# Altium PCB 5V_SPI_Oled_Rev1.1.PcbDoc
Units mil, origin at the board's own origin, x right, y up, seen from the top; angles counter-clockwise.
Board outline 1000 x 871 mil, 2 copper layers (Top Layer, Bottom Layer); 13 components, 20 nets, 76 pads, 9 vias.
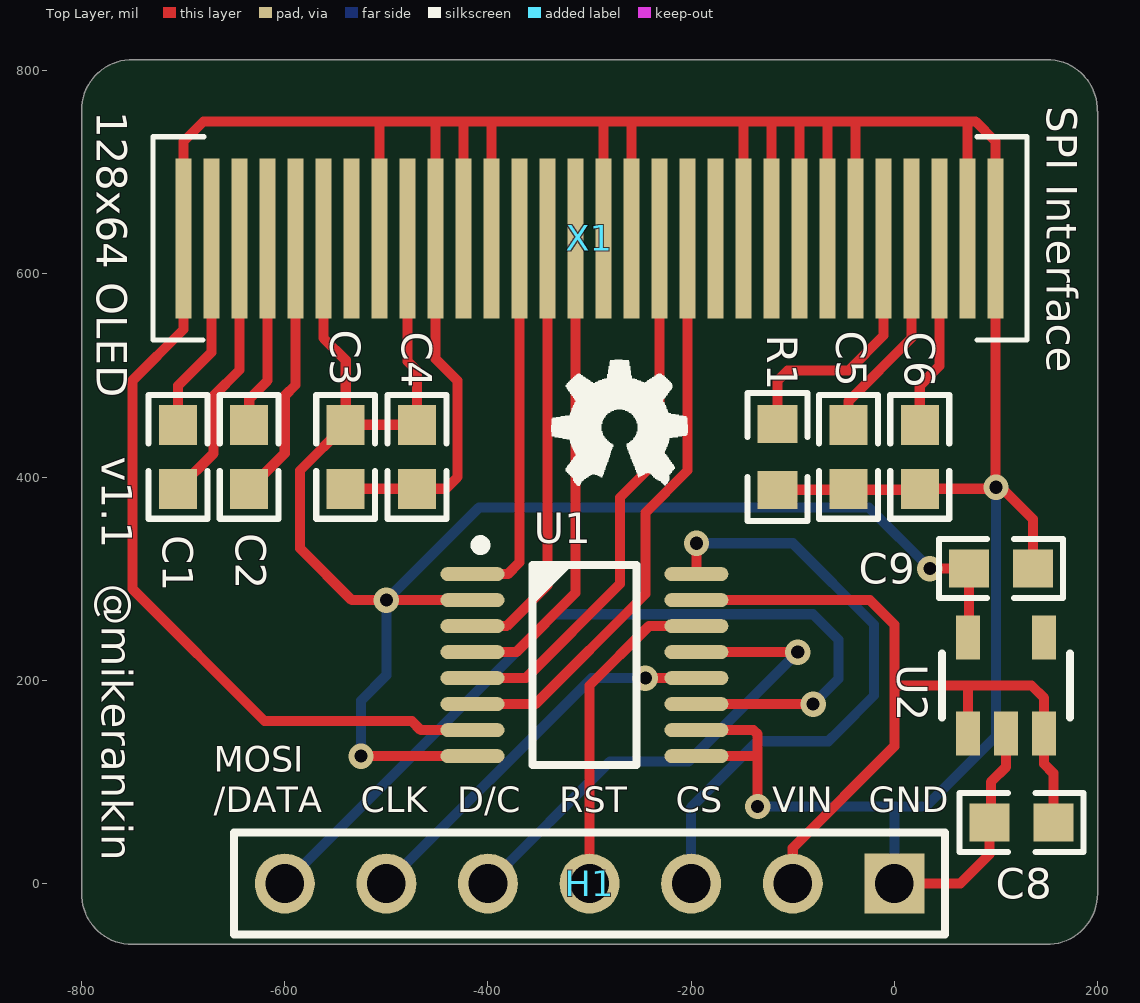
[diagram p0: Top Layer view]
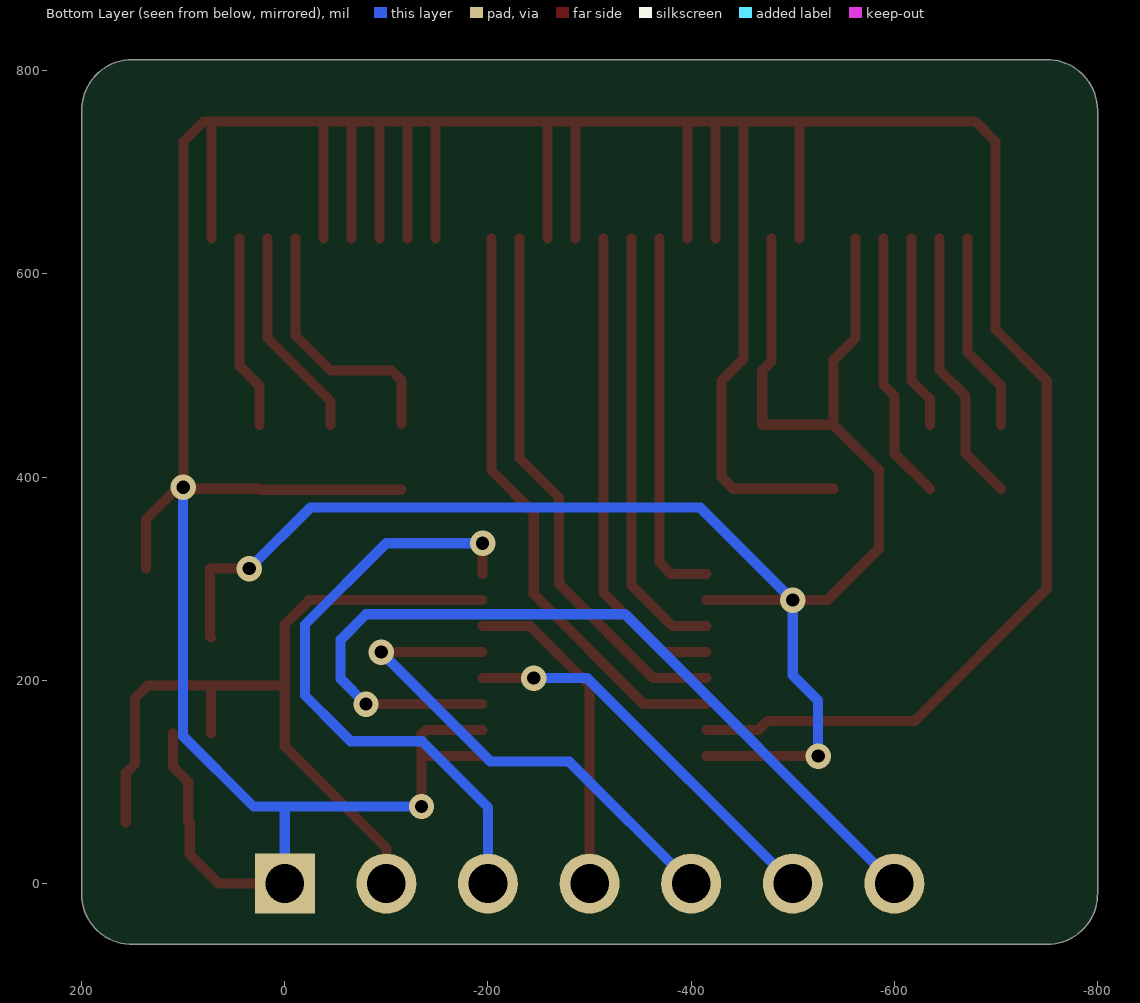
[diagram p1: Bottom Layer view, seen from below]
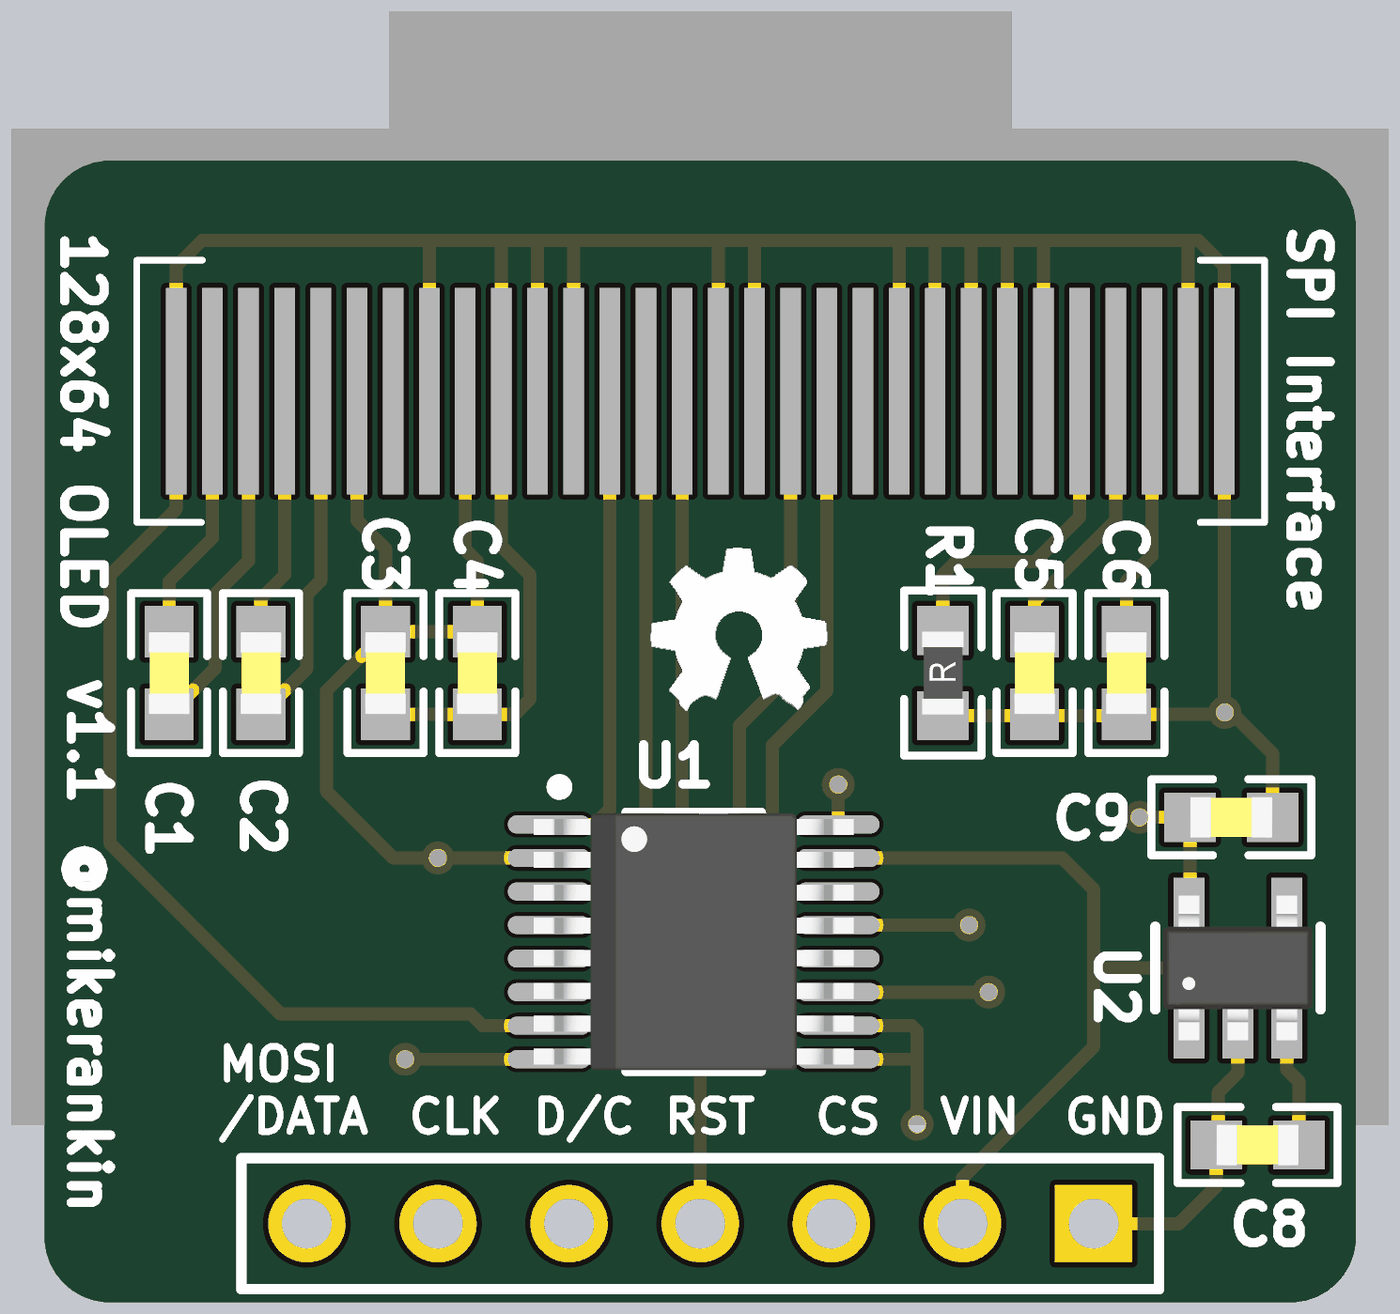
[diagram p2: 3D render of the assembled board from above, using the file's embedded part models]

## Layer stack, top to bottom
Top Solder: solder mask 0.4, Solder Resist, Dk 3.5
Top Layer: signal copper 1.4
Dielectric1: dielectric 12.6, FR-4, Dk 4.8
Bottom Layer: signal copper 1.4
Bottom Solder: solder mask 0.4, Solder Resist, Dk 3.5

## Board outline
-799.99,-9 ccw(c-750,-10) -750,-60 149,-60 149,-59.99 ccw(c150,-10) 200,-10 200,760 199.88,760 ccw(c149.89,761) 149.89,811 -749,811 -749,810.99 ccw(c-750,761) -800,761

## Design rules (kind name [scope] priority, off if disabled: settings)
Clearance TSSOP [HasFootprint('16-SSOP')] p1: gap=7.5
Clearance [All] p2: gap=10
MinimumSolderMaskSliver [All] p1: minsoldermaskwidth=3
PolygonConnect [All] p1: connectstyle=Relief reliefconductorwidth=10 reliefentries=4 polygonreliefangle="90 Angle" airgapwidth=10
RoutingVias [All] p1: holewidth=28 width=50 viastyle="Through Hole" minholewidth=28 minwidth=50 maxholewidth=28 maxwidth=50
SilkToSilkClearance [All] p1: silktosilkclearance=5
SilkToSolderMaskClearance [IsPad] p1: minsilkscreentomaskgap=5 clearancetoexposedcopper=TRUE
SolderMaskExpansion [All] p1: expansion=4
Width [All] p1: maxlimit=10 minlimit=10 preferedwidth=10
26 further rules are at their usual default settings.

## Components (designator, comment, footprint, x,y, rotation, side; value= is the part's Value field where it differs from the comment)
C1 "1uF" CAPC1608X90N -705,420 r90 top
C2 "1uF" CAPC1608X90N -635,420 r90 top
C3 "1uF" CAPC1608X90N -540,420 r90 top
C4 "1uF" CAPC1608X90N -470,420 r90 top
C5 "4.7uF" CAPC1608X90N -45,420 r90 top
C6 "2.2uF" CAPC1608X90N 25,420 r90 top
C8 "0.1uF" CAPC1608X90N 125,60 r180 top
C9 "1uF, 10V" CAPC1608X90N 105,310 r0 top
H1 "CON7" HDR1X7 -300,0 r180 top
R1 "390K" RESC1608X55N -115,420 r90 top
U1 "TXB0106" SOP65P602X173-16N -305,215 r0 top
U2 "LP2985-33DBVR" SOT95P280X144-5N 110,195 r90 top
X1 "OLED_GLASS" OLED_GLASS -300,635 r0 bottom

## Footprints (in the part's own frame and the unit in brackets; to place one, negate y for a bottom-side part, rotate by r counter-clockwise, add the part's x,y. Pads: shape width x height; smd on the part's side, far side on the other; paste and mask are expansions set on the pad)
CAPC1608X90N [mm] "Chip Capacitor, 2-Leads, Body 1.6x0.8mm, IPC Medium Density (0603)"
  rect 1x0.95 smd: 1(-0.8,0) 2(0.8,0)
  silkscreen extent -1.55,-0.74 1.55,0.74, body extent -0.8,-0.4 0.8,0.4, height 0.79
HDR1X7 [mm]
  rect 1.5x1.5 hole 0.965: 1(-7.62,0)
  round 1.5 hole 0.965: 2(-5.08,0) 3(-2.54,0) 4(0,0) 5(2.54,0) 6(5.08,0) 7(7.62,0)
  silkscreen extent -8.89,-1.27 8.89,1.27
OLED_GLASS [mm] "OLED_GLASS"
  rect 0.4x4 smd far side: 1(-10.15,0) 2(-9.45,0) 3(-8.75,0) 4(-8.05,0) 5(-7.35,0) 6(-6.65,0) 7(-5.95,0) 8(-5.25,0) 9(-4.55,0) 10(-3.85,0) 11(-3.15,0) 12(-2.45,0) 13(-1.75,0) 14(-1.05,0) 15(-0.35,0) 16(0.35,0) 17(1.05,0) 18(1.75,0) 19(2.45,0) 20(3.15,0) 21(3.85,0) 22(4.55,0) 23(5.25,0) 24(5.95,0) 25(6.65,0) 26(7.35,0) 27(8.05,0) 28(8.75,0) 29(9.45,0) 30(10.15,0)
  body extent -13.33,-7.37 13.34,14.22, height 3.33
RESC1608X55N [mm] "Chip Resistor, 2-Leads, Body 1.6x0.8mm, IPC Medium Density (0603 med)"
  rect 0.95x1 smd: 1(-0.825,0) 2(0.825,0)
  silkscreen extent -1.6,-0.75 1.6,0.75, body extent -0.8,-0.4 0.8,0.4, height 0.54
SOP65P602X173-16N [mm] "SOP, 16-Leads, Body 5.0x4.0mm (max), Pitch 0.65mm, IPC Medium Density"
  oval 1.6x0.35 smd mask+0.076: 1(-2.8,2.275) 2(-2.8,1.625) 3(-2.8,0.975) 4(-2.8,0.325) 5(-2.8,-0.325) 6(-2.8,-0.975) 7(-2.8,-1.625) 8(-2.8,-2.275) 9(2.8,-2.275) 10(2.8,-1.625) 11(2.8,-0.975) 12(2.8,-0.325) 13(2.8,0.325) 14(2.8,0.975) 15(2.8,1.625) 16(2.8,2.275)
  silkscreen extent -2.72,-2.5 1.3,3.12, body extent -3.1,-2.49 3.1,2.49, height 1.78
SOT95P280X144-5N [mm] "SOT23, 5-Leads, Body 3.1x3.0mm (max), Pitch 0.95mm, IPC Medium Density (RFMD SOT23-5)"
  rect 1.1x0.6 smd: 1(-1.2,0.95) 2(-1.2,0) 3(-1.2,-0.95) 4(1.2,-0.95) 5(1.2,0.95)
  silkscreen extent -0.8,-1.6 0.8,1.6, body extent -1.4,-1.45 1.4,1.45, height 1.45

## Part data
C1 C2 C3 C4 C5 C6 C8: library part CAP_0603, "CAP 0603"
C9: library part C1608X7R1A105K, "CAP CER 1UF 10V 10% X7R 0603"
H1: "CONN HEADER 7POS .100\" PADS"
R1: library part RES_0603, "RES 0603"
U1: library part TXB0106IPWRQ1, "IC XLATR 6B BIDIR V-LVL 16TSSOP"
U2: "IC REG LDO 3.3V .15A SOT23-5"

## Via types
v1: diameter 25, hole 13, Top Layer to Bottom Layer, tented both sides, 9 vias

## Nets (pads, with @x,y where several pads share a name; then routed paths per layer and width w, separated by ;. In a path a pad name is that pad's centre, name@x,y a point inside that pad or via, vN(x,y) a via of type N, cw(c..) or ccw(c..) an arc to the next point about the centre after c; other vN are vias at no path point)
+3.3V: C3.2 C4.2 C9.1 U1.2 U1.8 U2.5 X1.6 X1.9 | length 1758.7
  Top Layer w10: X1.6 -561.81,536.81 -540,515 C3.2 ; v1(-525,125.43) U1.8 ; X1.9 -479.13,514.13 -470,505 C4.2 C3.2 ; U1.2 v1(-500,278.98) -533.98,278.98 -585,330 -585,406.5 C3.2 ; v1(35,310) C9.1 73.5,243.15 U2.5
  Bottom Layer w10: v1(-525,125.43) -525,180 -500,205 v1(-500,278.98) -408.98,370 -25,370 v1(35,310)
GND: C3.1 C4.1 C5.1 C6.1 C8.2 C9.2 H1.1 R1.1 U1.7 U1.9 U1.10 U2.2 X1.1 X1.8 X1.10 X1.11 X1.12 X1.16 X1.17 X1.21 X1.22 X1.23 X1.24 X1.25 X1.29 X1.30 | length 5071.3
  Top Layer w10: C3.1 C4.1 -441.5,388.5 -430,400 -430,495 -451.57,516.57 X1.10 -451.57,750 ; X1.8 -506.69,750 ; X1.11 -424.02,750 ; U1.7 -466.02,151.02 -475,160 -620,160 -750,290 -750,495 -699.61,545.39 X1.1 -699.61,730.39 -680,750 -506.69,750 ; X1.12 -396.46,750 ; X1.16 -286.22,750 ; X1.17 -258.66,750 ; U1.9 -134.59,125.43 ; U1.10 -138.61,151.02 -134.59,147 -134.59,125.43 ; X1.21 -148.43,750 ; v1(-134.59,75.83) -134.59,125.43 ; X1.22 -120.87,750 ; R1.1 24.02,387.52 C6.1 v1@100,388.5 ; X1.23 -93.31,750 ; X1.24 -65.75,750 ; X1.25 -38.19,750 ; H1.1 65,0 93.5,28.5 C8.2 95,61.5 95,100 110,115 U2.2 ; X1.29 72.05,750 ; C9.2 136.5,358.5 106.5,388.5 v1@100,388.5 ; -506.69,750 -451.57,750 ; -451.57,750 -424.02,750 ; -424.02,750 -396.46,750 ; -396.46,750 -286.22,750 ; -286.22,750 -258.66,750 ; -258.66,750 -148.43,750 ; -148.43,750 -120.87,750 ; -120.87,750 -93.31,750 ; -93.31,750 -65.75,750 ; -65.75,750 -38.19,750 ; -38.19,750 72.05,750 ; 72.05,750 80,750 99.61,730.39 X1.30 99.61,388.9 v1@100,388.5
  Bottom Layer w10: v1(-134.59,75.83) 0,75.83 ; H1.1 0,75.83 ; v1(100,390) 100,145 30.83,75.83 0,75.83
NetC1_1: C1.1 X1.3 | length 271.6
  Top Layer w10: C1.1 -670,423.5 -670,480 -644.49,505.51 X1.3
NetC1_2: C1.2 X1.2 | length 197.2
  Top Layer w10: C1.2 -705,490 -672.05,522.95 X1.2
NetC2_1: C2.1 X1.5 | length 265.4
  Top Layer w10: C2.1 -600,423.5 -600,480 -589.37,490.63 X1.5
NetC2_2: C2.2 X1.4 | length 191
  Top Layer w10: C2.2 -635,476.93 -616.93,495 X1.4
NetC5_2: C5.2 X1.27 | length 209.2
  Top Layer w10: C5.2 -45,475 16.93,536.93 X1.27
NetC6_2: C6.2 X1.28 | length 191.6
  Top Layer w10: C6.2 25,490 44.49,509.49 X1.28
NetH1_3: H1.3 U1.16 | length 608.9
  Top Layer w10: U1.16 v1(-194.76,335)
  Bottom Layer w10: H1.3 -200,75 -170,105 -135,140 -65,140 -55,150 -20,185 -20,255 -100,335 v1(-194.76,335)
NetH1_4: H1.4 U1.14 | length 324.4
  Top Layer w10: H1.4 -300,195 -241.61,253.39 U1.14
NetH1_5: H1.5 U1.13 | length 499.1
  Top Layer w10: U1.13 v1(-95,227.8)
  Bottom Layer w10: H1.5 -280,120 -202.8,120 v1(-95,227.8)
NetH1_6: H1.6 U1.12 | length 389
  Top Layer w10: v1(-245,202.2) U1.12
  Bottom Layer w10: H1.6 -297.8,202.2 v1(-245,202.2)
NetH1_7: H1.7 U1.11 | length 853.6
  Top Layer w10: U1.11 v1(-80,176.61)
  Bottom Layer w10: H1.7 -335,265 -80,265 -55,240 -55,230 -55,201.61 v1(-80,176.61)
NetR1_2: R1.2 X1.26 | length 260.9
  Top Layer w10: R1.2 -115,495 -105,505 -45,505 -10.63,539.37 X1.26
NetU1_1: U1.1 X1.13 | length 370
  Top Layer w10: U1.1 -380.43,304.57 -368.9,316.1 X1.13
NetU1_3: U1.3 X1.14 | length 431.9
  Top Layer w10: U1.3 -381.61,253.39 -341.34,293.66 X1.14
NetU1_4: U1.4 X1.15 | length 474.4
  Top Layer w10: U1.4 -372.2,227.8 -313.78,286.22 X1.15
NetU1_5: U1.5 X1.18 | length 539.8
  Top Layer w10: U1.5 -362.8,202.2 -270,295 -270,380 -231.1,418.9 X1.18
NetU1_6: U1.6 X1.19 | length 582.3
  Top Layer w10: U1.6 -353.39,176.61 -245,285 -245,365 -203.54,406.46 X1.19
VIN: C8.1 H1.2 U1.15 U2.1 U2.3 | length 827.3
  Top Layer w10: U1.15 -23.98,278.98 0,255 0,195 ; H1.2 -100,35 0,135 0,195 ; U2.1 72.6,195 ; C8.1 156.5,108.5 147.4,117.6 U2.3 147.4,182.6 135,195 72.6,195 ; 0,195 72.6,195
pads on no net: U2.4 X1.7 X1.20

## Silkscreen, mask and mechanical layers (free items; w line width, h text height)
Top Overlay:
  region: 697 vertices and 0 holes, not listed, extent -337.84,391.35 -203.25,515.75
  text "SPI Interface" at 150,765 h30 r270
  text "128x64 OLED" at -785,760 h30 r270
  text "v1.1" at -780,420 h30 r270
  text "@mikerankin" at -780,295 h30 r270
  text "MOSI" at -670,110 h25
  text "/DATA" at -670,70 h25
  text "CLK" at -525,70 h25
  text "D/C" at -430,70 h25
  text "RST" at -330,70 h25
  text "CS" at -215,70 h25
  text "VIN" at -120,70 h25
  text "GND" at -25,70 h25
Mechanical 1:
  lines w10: 199.88,760 ccw(c149.89,761) 149.89,811 125,811 -749,811 ccw(c-750,761) -800,761 -800,-9 ccw(c-750,-10) -750,-60 150.01,-60 ccw(c150.01,-10) 200,-9 ; 200,-10 200,760